# EAGLE board SOCKET_L_PANELISE (EAGLE 9.2.2)
CIRCULAR-LAYOUT-SETTINGS: 0.000000 0.000000 0.238189 -1.000000 0 0
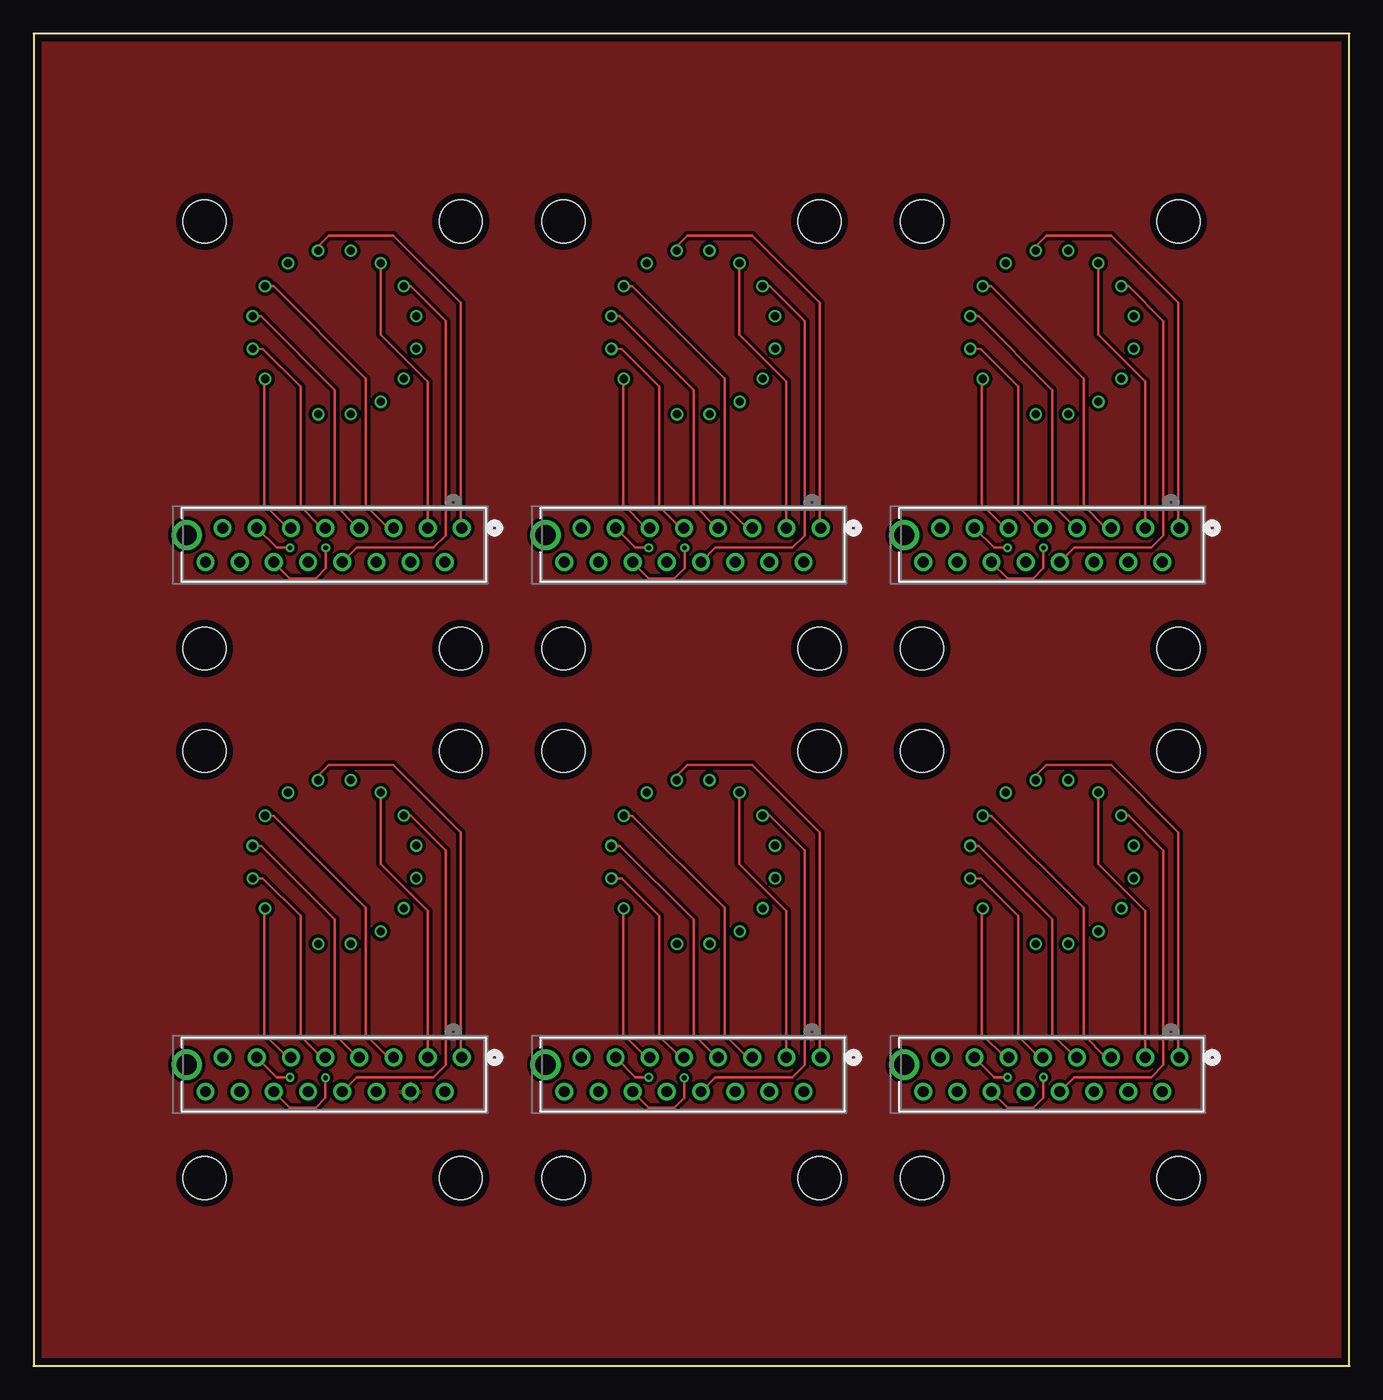
[diagram p0: board, top side]
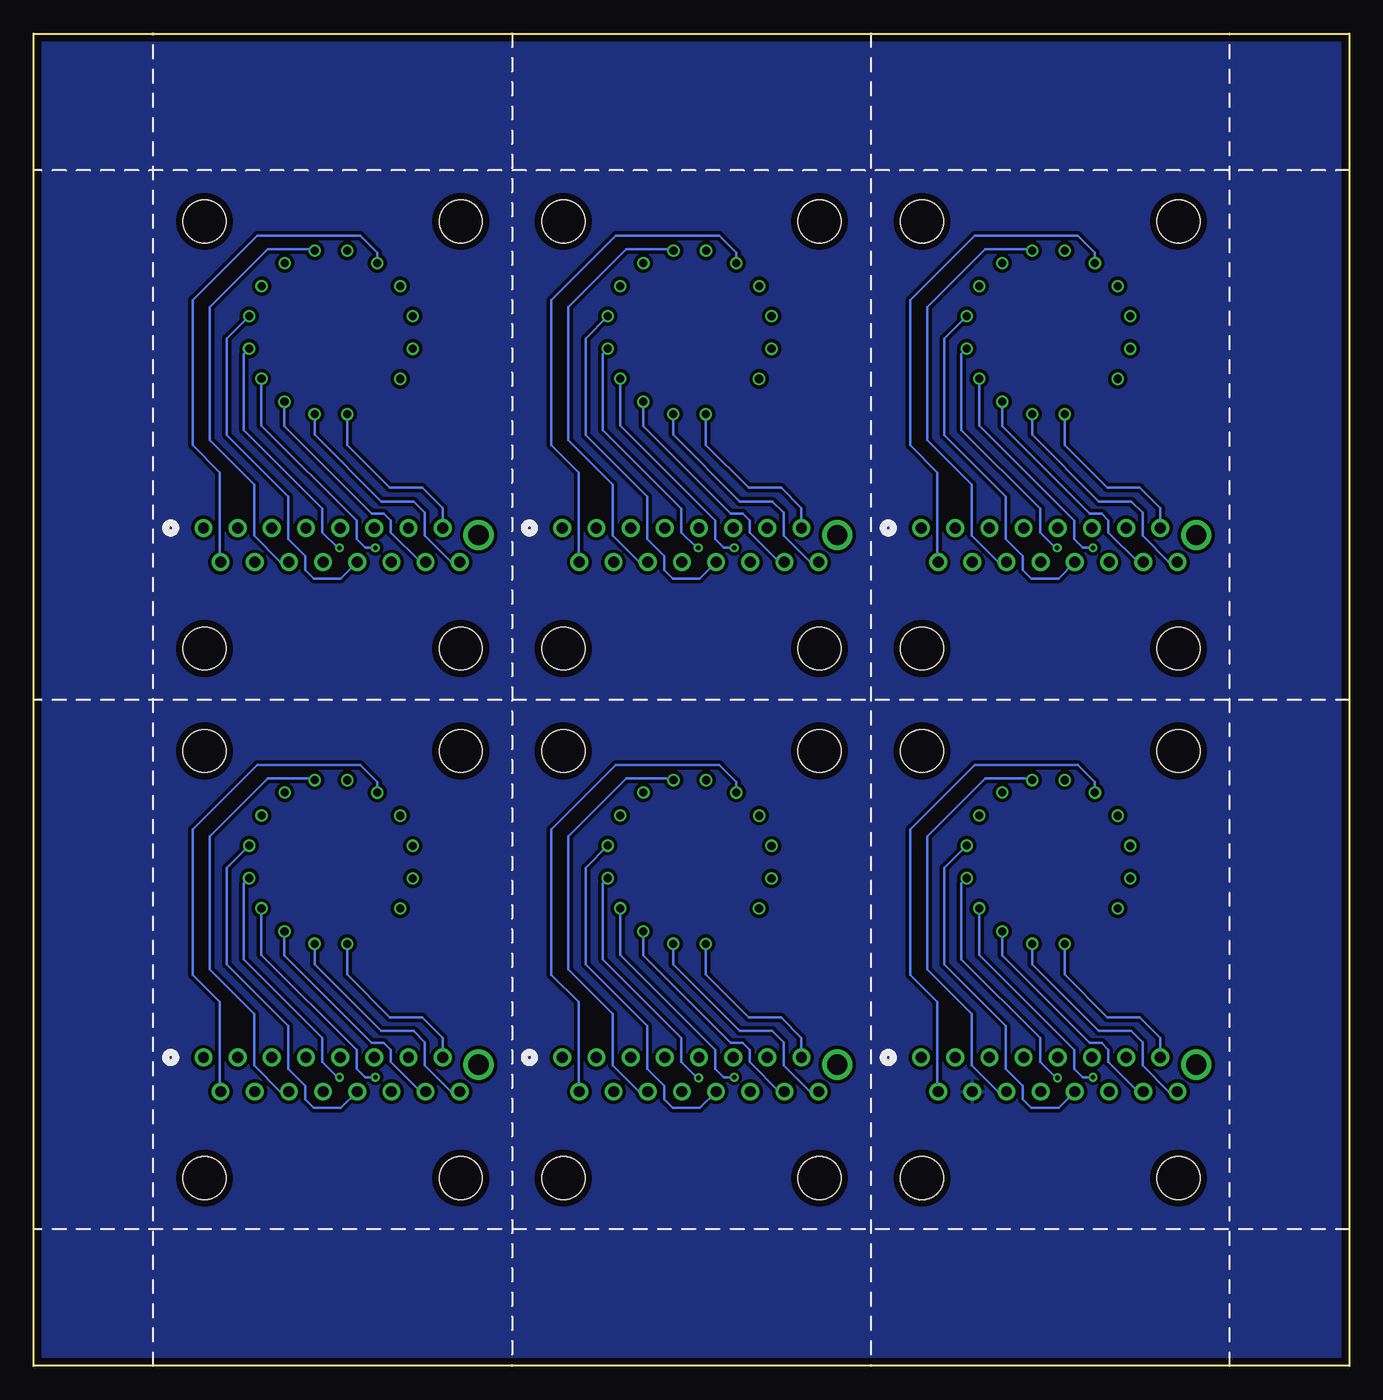
[diagram p1: board, bottom side, seen from below]

Size 97.79 x 99.06 mm. Coordinates in mm from the lower left corner, seen from the top.
Outline: 0,0 97.79,0 97.79,99.06 0,99.06 0,0
Copper layers (1*16): Top 0.035mm / dielectric 1.6mm / Bottom 0.035mm
Design rules "Elecrow_2-layer_PCB_eagle_rule": minimum track width 6mil, minimum drill 12mil, track to track 6mil, track to pad 6mil, pad to pad 6mil, via to via 8mil, smd to smd 0mil, copper to edge 20mil, drill to drill 10mil, minimum pad ring 6mil, minimum via ring 6mil, stop-mask expansion 0mil, vias tented up to drill 100mil, thermal gap 10mil
Net classes: 0 default: width 0.203 mm, clearance 0.254 mm
Holes 3.2 mm at 12.7,45.72 31.75,45.72 12.7,13.97 31.75,13.97 39.37,45.72 58.42,45.72 39.37,13.97 58.42,13.97 66.04,45.72 85.09,45.72 66.04,13.97 85.09,13.97 12.7,85.09 31.75,85.09 12.7,53.34 31.75,53.34 39.37,85.09 58.42,85.09 39.37,53.34 58.42,53.34 66.04,85.09 85.09,85.09 66.04,53.34 85.09,53.34

## Footprints (pad centres in the part's own frame; a part is rotated, then mirrored left to right if it is on the bottom)
CONN16_8-215079-6 = drill 0.813 pad 1.321: 1 0.051,-0.076; 2 2.591,-0.076; 3 5.131,-0.076; 4 7.671,-0.076; 5 10.211,-0.076; 6 12.751,-0.076; 7 15.291,-0.076; 8 17.831,-0.076; 9 1.321,2.464; 10 3.861,2.464; 11 6.401,2.464; 12 8.941,2.464; 13 11.481,2.464; 14 14.021,2.464; 15 16.561,2.464; 16 19.101,2.464 | drill 1.499 pad 1.499: 17 20.498,0.457
IV-27_L = drill 0.6: 1 -5.149,-3.446; 2 -6.076,-1.211; 3 -6.078,1.208; 4 -5.155,3.443; 5 -3.446,5.155; 6 -1.211,6.083; 7 1.208,6.085; 8 3.443,5.161; 9 5.156,3.452; 10 6.083,1.218; 11 6.085,-1.201; 12 5.162,-3.437; 13 3.452,-5.149; 14 1.218,-6.076; 15 -1.201,-6.078

## Placement (x,y rotation side)
IV-27_L  8-215079-6  [CONN16_8-215079-6]  31.88,22.86 180 top
IV-27_L1  8-215079-6  [CONN16_8-215079-6]  58.55,22.86 180 top
IV-27_L2  8-215079-6  [CONN16_8-215079-6]  85.22,22.86 180 top
IV-27_L3  8-215079-6  [CONN16_8-215079-6]  31.88,62.22 180 top
IV-27_L4  8-215079-6  [CONN16_8-215079-6]  58.55,62.22 180 top
IV-27_L5  8-215079-6  [CONN16_8-215079-6]  85.22,62.22 180 top
U$1  IV-27_L  [IV-27_L]  22.35,37.47 0 top
U$2  IV-27_L  [IV-27_L]  49.02,37.47 0 top
U$3  IV-27_L  [IV-27_L]  75.69,37.47 0 top
U$4  IV-27_L  [IV-27_L]  22.35,76.83 0 top
U$5  IV-27_L  [IV-27_L]  49.02,76.83 0 top
U$6  IV-27_L  [IV-27_L]  75.69,76.83 0 top

## Library data of the parts
IV-27_L IV-27_L1-IV-27_L5 = 8-215079-6; MANUFACTURER_PART_NUMBER: 82150796; VENDOR: TE Connectivity
U$1-U$6 = IV-27_L

## Nets
GND: IV-27_L.10
GND1: IV-27_L1.10
GND2: IV-27_L2.10
GND3: IV-27_L3.10
GND4: IV-27_L4.10
GND5: IV-27_L5.10
GRID1: IV-27_L.16 U$1.14
GRID2: IV-27_L.8 U$1.15
GRID3: IV-27_L.9 U$1.5
GRID4: IV-27_L.3 U$1.4
GRID5: IV-27_L.4 U$1.3
GRID6: IV-27_L.5 U$1.2
GRID7: IV-27_L.6 U$1.1
GRID8: IV-27_L1.16 U$2.14
GRID9: IV-27_L1.8 U$2.15
GRID10: IV-27_L1.9 U$2.5
GRID11: IV-27_L1.3 U$2.4
GRID12: IV-27_L1.4 U$2.3
GRID13: IV-27_L1.5 U$2.2
GRID14: IV-27_L1.6 U$2.1
GRID15: IV-27_L2.16 U$3.14
GRID16: IV-27_L2.8 U$3.15
GRID17: IV-27_L2.9 U$3.5
GRID18: IV-27_L2.3 U$3.4
GRID19: IV-27_L2.4 U$3.3
GRID20: IV-27_L2.5 U$3.2
GRID21: IV-27_L2.6 U$3.1
GRID22: IV-27_L3.16 U$4.14
GRID23: IV-27_L3.8 U$4.15
GRID24: IV-27_L3.9 U$4.5
GRID25: IV-27_L3.3 U$4.4
GRID26: IV-27_L3.4 U$4.3
GRID27: IV-27_L3.5 U$4.2
GRID28: IV-27_L3.6 U$4.1
GRID29: IV-27_L4.16 U$5.14
GRID30: IV-27_L4.8 U$5.15
GRID31: IV-27_L4.9 U$5.5
GRID32: IV-27_L4.3 U$5.4
GRID33: IV-27_L4.4 U$5.3
GRID34: IV-27_L4.5 U$5.2
GRID35: IV-27_L4.6 U$5.1
GRID36: IV-27_L5.16 U$6.14
GRID37: IV-27_L5.8 U$6.15
GRID38: IV-27_L5.9 U$6.5
GRID39: IV-27_L5.3 U$6.4
GRID40: IV-27_L5.4 U$6.3
GRID41: IV-27_L5.5 U$6.2
GRID42: IV-27_L5.6 U$6.1
SEG-A: IV-27_L.1 U$1.6
SEG-A1: IV-27_L1.1 U$2.6
SEG-A2: IV-27_L2.1 U$3.6
SEG-A3: IV-27_L3.1 U$4.6
SEG-A4: IV-27_L4.1 U$5.6
SEG-A5: IV-27_L5.1 U$6.6
SEG-B: IV-27_L.2 U$1.8
SEG-B1: IV-27_L1.2 U$2.8
SEG-B2: IV-27_L2.2 U$3.8
SEG-B3: IV-27_L3.2 U$4.8
SEG-B4: IV-27_L4.2 U$5.8
SEG-B5: IV-27_L5.2 U$6.8
SEG-C: IV-27_L.14 U$1.11
SEG-C1: IV-27_L1.14 U$2.11
SEG-C2: IV-27_L2.14 U$3.11
SEG-C3: IV-27_L3.14 U$4.11
SEG-C4: IV-27_L4.14 U$5.11
SEG-C5: IV-27_L5.14 U$6.11
SEG-D: IV-27_L.7 U$1.12
SEG-D1: IV-27_L1.7 U$2.12
SEG-D2: IV-27_L2.7 U$3.12
SEG-D3: IV-27_L3.7 U$4.12
SEG-D4: IV-27_L4.7 U$5.12
SEG-D5: IV-27_L5.7 U$6.12
SEG-DP: IV-27_L.15 U$1.13
SEG-DP1: IV-27_L1.15 U$2.13
SEG-DP2: IV-27_L2.15 U$3.13
SEG-DP3: IV-27_L3.15 U$4.13
SEG-DP4: IV-27_L4.15 U$5.13
SEG-DP5: IV-27_L5.15 U$6.13
SEG-E: IV-27_L.13 U$1.10
SEG-E1: IV-27_L1.13 U$2.10
SEG-E2: IV-27_L2.13 U$3.10
SEG-E3: IV-27_L3.13 U$4.10
SEG-E4: IV-27_L4.13 U$5.10
SEG-E5: IV-27_L5.13 U$6.10
SEG-F: IV-27_L.11 U$1.7
SEG-F1: IV-27_L1.11 U$2.7
SEG-F2: IV-27_L2.11 U$3.7
SEG-F3: IV-27_L3.11 U$4.7
SEG-F4: IV-27_L4.11 U$5.7
SEG-F5: IV-27_L5.11 U$6.7
SEG-G: IV-27_L.12 U$1.9
SEG-G1: IV-27_L1.12 U$2.9
SEG-G2: IV-27_L2.12 U$3.9
SEG-G3: IV-27_L3.12 U$4.9
SEG-G4: IV-27_L4.12 U$5.9
SEG-G5: IV-27_L5.12 U$6.9

## Tracks (layer width: path | path; a pad name or v marks a point on that pad's centre or on a via)
GND
  pour Top (isolate 0.254): 0,99.06 97.79,99.06 97.79,0 0,0
  pour Bottom (isolate 0.254): 0,99.06 97.79,99.06 97.79,0 0,0
GRID1
  Bottom 0.203: U$1.14 23.57,29.86 18.62,24.91 16.2,24.91 15.37,24.07 15.37,22.35 13.41,20.39 IV-27_L.16
GRID2
  Bottom 0.203: U$1.15 21.15,29.1 17.98,25.92 15.56,25.92 14.05,24.4 IV-27_L.8
GRID3
  Bottom 0.203: U$1.5 18.91,43.42 20.17,44.68 27.84,44.68 32.64,39.88 32.64,29.08 30.61,27.05 30.61,20.44 IV-27_L.9
GRID4
  Top 0.203: U$1.4 17.83,40.9 24.7,34.03 24.7,24.59 26.37,22.93 IV-27_L.3
GRID5
  Top 0.203: U$1.3 16.91,38.67 22.38,33.2 22.38,24.66 24.11,22.93 IV-27_L.4
GRID6
  Top 0.203: IV-27_L.5 21.41,22.93 19.84,24.51 19.84,33.45 17.04,36.25 U$1.2
GRID7
  Top 0.203: IV-27_L.6 18.87,22.93 17.15,24.66 17.15,33.96 U$1.1
GRID8
  Bottom 0.203: U$2.14 50.24,29.86 45.29,24.91 42.87,24.91 42.04,24.07 42.04,22.35 40.08,20.39 IV-27_L1.16
GRID9
  Bottom 0.203: U$2.15 47.82,29.1 44.65,25.92 42.23,25.92 40.72,24.4 IV-27_L1.8
GRID10
  Bottom 0.203: U$2.5 45.58,43.42 46.84,44.68 54.51,44.68 59.31,39.88 59.31,29.08 57.28,27.05 57.28,20.44 IV-27_L1.9
GRID11
  Top 0.203: U$2.4 44.5,40.9 51.37,34.03 51.37,24.59 53.04,22.93 IV-27_L1.3
GRID12
  Top 0.203: U$2.3 43.58,38.67 49.05,33.2 49.05,24.66 50.78,22.93 IV-27_L1.4
GRID13
  Top 0.203: IV-27_L1.5 48.08,22.93 46.51,24.51 46.51,33.45 43.71,36.25 U$2.2
GRID14
  Top 0.203: IV-27_L1.6 45.54,22.93 43.81,24.66 43.81,33.96 U$2.1
GRID15
  Bottom 0.203: U$3.14 76.91,29.86 71.96,24.91 69.54,24.91 68.71,24.07 68.71,22.35 66.75,20.39 IV-27_L2.16
GRID16
  Bottom 0.203: U$3.15 74.49,29.1 71.32,25.92 68.9,25.92 67.39,24.4 IV-27_L2.8
GRID17
  Bottom 0.203: U$3.5 72.25,43.42 73.51,44.68 81.18,44.68 85.98,39.88 85.98,29.08 83.95,27.05 83.95,20.44 IV-27_L2.9
GRID18
  Top 0.203: U$3.4 71.17,40.9 78.04,34.03 78.04,24.59 79.7,22.93 IV-27_L2.3
GRID19
  Top 0.203: U$3.3 70.25,38.67 75.72,33.2 75.72,24.66 77.45,22.93 IV-27_L2.4
GRID20
  Top 0.203: IV-27_L2.5 74.75,22.93 73.18,24.51 73.18,33.45 70.38,36.25 U$3.2
GRID21
  Top 0.203: IV-27_L2.6 72.21,22.93 70.48,24.66 70.48,33.96 U$3.1
GRID22
  Bottom 0.203: U$4.14 23.57,69.23 18.62,64.28 16.2,64.28 15.37,63.44 15.37,61.72 13.41,59.76 IV-27_L3.16
GRID23
  Bottom 0.203: U$4.15 21.15,68.47 17.98,65.29 15.56,65.29 14.05,63.77 IV-27_L3.8
GRID24
  Bottom 0.203: U$4.5 18.91,82.79 20.17,84.05 27.84,84.05 32.64,79.25 32.64,68.45 30.61,66.42 30.61,59.81 IV-27_L3.9
GRID25
  Top 0.203: U$4.4 17.83,80.27 24.7,73.4 24.7,63.97 26.37,62.3 IV-27_L3.3
GRID26
  Top 0.203: U$4.3 16.91,78.04 22.38,72.57 22.38,64.03 24.11,62.3 IV-27_L3.4
GRID27
  Top 0.203: IV-27_L3.5 21.41,62.3 19.84,63.88 19.84,72.82 17.04,75.62 U$4.2
GRID28
  Top 0.203: IV-27_L3.6 18.87,62.3 17.15,64.03 17.15,73.33 U$4.1
GRID29
  Bottom 0.203: U$5.14 50.24,69.23 45.29,64.28 42.87,64.28 42.04,63.44 42.04,61.72 40.08,59.76 IV-27_L4.16
GRID30
  Bottom 0.203: U$5.15 47.82,68.47 44.65,65.29 42.23,65.29 40.72,63.77 IV-27_L4.8
GRID31
  Bottom 0.203: U$5.5 45.58,82.79 46.84,84.05 54.51,84.05 59.31,79.25 59.31,68.45 57.28,66.42 57.28,59.81 IV-27_L4.9
GRID32
  Top 0.203: U$5.4 44.5,80.27 51.37,73.4 51.37,63.97 53.04,62.3 IV-27_L4.3
GRID33
  Top 0.203: U$5.3 43.58,78.04 49.05,72.57 49.05,64.03 50.78,62.3 IV-27_L4.4
GRID34
  Top 0.203: IV-27_L4.5 48.08,62.3 46.51,63.88 46.51,72.82 43.71,75.62 U$5.2
GRID35
  Top 0.203: IV-27_L4.6 45.54,62.3 43.81,64.03 43.81,73.33 U$5.1
GRID36
  Bottom 0.203: U$6.14 76.91,69.23 71.96,64.28 69.54,64.28 68.71,63.44 68.71,61.72 66.75,59.76 IV-27_L5.16
GRID37
  Bottom 0.203: U$6.15 74.49,68.47 71.32,65.29 68.9,65.29 67.39,63.77 IV-27_L5.8
GRID38
  Bottom 0.203: U$6.5 72.25,82.79 73.51,84.05 81.18,84.05 85.98,79.25 85.98,68.45 83.95,66.42 83.95,59.81 IV-27_L5.9
GRID39
  Top 0.203: U$6.4 71.17,80.27 78.04,73.4 78.04,63.97 79.7,62.3 IV-27_L5.3
GRID40
  Top 0.203: U$6.3 70.25,78.04 75.72,72.57 75.72,64.03 77.45,62.3 IV-27_L5.4
GRID41
  Top 0.203: IV-27_L5.5 74.75,62.3 73.18,63.88 73.18,72.82 70.38,75.62 U$6.2
GRID42
  Top 0.203: IV-27_L5.6 72.21,62.3 70.48,64.03 70.48,73.33 U$6.1
SEG-A
  Top 0.203: U$1.6 21.14,43.9 21.92,44.68 26.75,44.68 31.75,39.67 31.75,22.96 IV-27_L.1
SEG-A1
  Top 0.203: U$2.6 47.81,43.9 48.59,44.68 53.42,44.68 58.42,39.67 58.42,22.96 IV-27_L1.1
SEG-A2
  Top 0.203: U$3.6 74.48,43.9 75.26,44.68 80.09,44.68 85.09,39.67 85.09,22.96 IV-27_L2.1
SEG-A3
  Top 0.203: U$4.6 21.14,83.27 21.92,84.05 26.75,84.05 31.75,79.05 31.75,62.33 IV-27_L3.1
SEG-A4
  Top 0.203: U$5.6 47.81,83.27 48.59,84.05 53.42,84.05 58.42,79.05 58.42,62.33 IV-27_L4.1
SEG-A5
  Top 0.203: U$6.6 74.48,83.27 75.26,84.05 80.09,84.05 85.09,79.05 85.09,62.33 IV-27_L5.1
SEG-B
  Top 0.203: IV-27_L.2 29.29,33.83 25.8,37.32 U$1.8
SEG-B1
  Top 0.203: IV-27_L1.2 55.96,33.83 52.47,37.32 U$2.8
SEG-B2
  Top 0.203: IV-27_L2.2 82.63,33.83 79.14,37.32 U$3.8
SEG-B3
  Top 0.203: IV-27_L3.2 29.29,73.2 25.8,76.69 U$4.8
SEG-B4
  Top 0.203: IV-27_L4.2 55.96,73.2 52.47,76.69 U$5.8
SEG-B5
  Top 0.203: IV-27_L5.2 82.63,73.2 79.14,76.69 U$6.8
SEG-C  (via drill 0.35)
  Top 0.203: v21.69,21.41 21.69,19.91 20.95,19.18 19.05,19.18 17.86,20.37 IV-27_L.14
  Bottom 0.203: U$1.11 28.83,35.87 28.83,30.23 22.99,24.38 22.99,22.61 21.79,21.41 v21.69,21.41
SEG-C1  (via drill 0.35)
  Top 0.203: v48.36,21.41 48.36,19.91 47.62,19.18 45.72,19.18 44.53,20.37 IV-27_L1.14
  Bottom 0.203: U$2.11 55.5,35.87 55.5,30.23 49.66,24.38 49.66,22.61 48.46,21.41 v48.36,21.41
SEG-C2  (via drill 0.35)
  Top 0.203: v75.06,21.46 75.06,19.94 74.3,19.18 72.39,19.18 71.2,20.37 IV-27_L2.14
  Bottom 0.203: U$3.11 82.17,35.87 82.17,30.23 76.33,24.38 76.33,22.61 75.18,21.46 v75.06,21.46
SEG-C3  (via drill 0.35)
  Top 0.203: v21.72,60.83 21.72,59.31 20.95,58.55 19.05,58.55 17.86,59.74 IV-27_L3.14
  Bottom 0.203: U$4.11 28.83,75.24 28.83,69.6 22.99,63.75 22.99,61.98 21.84,60.83 v21.72,60.83
SEG-C4  (via drill 0.35)
  Top 0.203: v48.39,60.83 48.39,59.31 47.62,58.55 45.72,58.55 44.53,59.74 IV-27_L4.14
  Bottom 0.203: U$5.11 55.5,75.24 55.5,69.6 49.66,63.75 49.66,61.98 48.51,60.83 v48.39,60.83
SEG-C5  (via drill 0.35)
  Top 0.203: v75.06,60.83 75.06,59.31 74.3,58.55 72.39,58.55 71.2,59.74 IV-27_L5.14
  Bottom 0.203: U$6.11 82.17,75.24 82.17,69.6 76.33,63.75 76.33,61.98 75.18,60.83 v75.06,60.83
SEG-D  (via drill 0.35)
  Top 0.203: v19.05,21.46 18.05,21.46 IV-27_L.7
  Bottom 0.203: U$1.12 27.51,30.56 20.45,23.5 20.45,22.1 19.81,21.46 v19.05,21.46
SEG-D1  (via drill 0.35)
  Top 0.203: v45.72,21.46 44.72,21.46 IV-27_L1.7
  Bottom 0.203: U$2.12 54.18,30.56 47.12,23.5 47.12,22.1 46.48,21.46 v45.72,21.46
SEG-D2  (via drill 0.35)
  Top 0.203: v72.39,21.46 71.39,21.46 IV-27_L2.7
  Bottom 0.203: U$3.12 80.85,30.56 73.79,23.5 73.79,22.1 73.15,21.46 v72.39,21.46
SEG-D3  (via drill 0.35)
  Top 0.203: v19.05,60.83 18.05,60.83 IV-27_L3.7
  Bottom 0.203: U$4.12 27.51,69.93 20.45,62.86 20.45,61.47 19.81,60.83 v19.05,60.83
SEG-D4  (via drill 0.35)
  Top 0.203: v45.72,60.83 44.72,60.83 IV-27_L4.7
  Bottom 0.203: U$5.12 54.18,69.93 47.12,62.86 47.12,61.47 46.48,60.83 v45.72,60.83
SEG-D5  (via drill 0.35)
  Top 0.203: v72.39,60.83 71.39,60.83 IV-27_L5.7
  Bottom 0.203: U$6.12 80.85,69.93 73.79,62.86 73.79,61.47 73.15,60.83 v72.39,60.83
SEG-DP
  Bottom 0.203: U$1.13 25.8,30.5 19.3,24 18.41,24 17.91,23.5 17.91,22.61 15.69,20.39 IV-27_L.15
SEG-DP1
  Bottom 0.203: U$2.13 52.47,30.5 45.97,24 45.09,24 44.58,23.5 44.58,22.61 42.36,20.39 IV-27_L1.15
SEG-DP2
  Bottom 0.203: U$3.13 79.14,30.5 72.64,24 71.75,24 71.25,23.5 71.25,22.61 69.03,20.39 IV-27_L2.15
SEG-DP3
  Bottom 0.203: U$4.13 25.8,69.87 19.3,63.37 18.41,63.37 17.91,62.86 17.91,61.98 15.69,59.76 IV-27_L3.15
SEG-DP4
  Bottom 0.203: U$5.13 52.47,69.87 45.97,63.37 45.09,63.37 44.58,62.86 44.58,61.98 42.36,59.76 IV-27_L4.15
SEG-DP5
  Bottom 0.203: U$6.13 79.14,69.87 72.64,63.37 71.75,63.37 71.25,62.86 71.25,61.98 69.03,59.76 IV-27_L5.15
SEG-E
  Bottom 0.203: U$1.10 30.1,37.02 30.1,29.84 25.53,25.27 25.53,22.1 24.26,20.83 24.26,19.81 23.62,19.18 21.61,19.18 IV-27_L.13
SEG-E1
  Bottom 0.203: U$2.10 56.77,37.02 56.77,29.84 52.2,25.27 52.2,22.1 50.93,20.83 50.93,19.81 50.29,19.18 48.28,19.18 IV-27_L1.13
SEG-E2
  Bottom 0.203: U$3.10 83.44,37.02 83.44,29.84 78.87,25.27 78.87,22.1 77.6,20.83 77.6,19.81 76.96,19.18 74.95,19.18 IV-27_L2.13
SEG-E3
  Bottom 0.203: U$4.10 30.1,76.38 30.1,69.22 25.53,64.64 25.53,61.47 24.26,60.2 24.26,59.18 23.62,58.55 21.61,58.55 IV-27_L3.13
SEG-E4
  Bottom 0.203: U$5.10 56.77,76.38 56.77,69.22 52.2,64.64 52.2,61.47 50.93,60.2 50.93,59.18 50.29,58.55 48.28,58.55 IV-27_L4.13
SEG-E5
  Bottom 0.203: U$6.10 83.44,76.38 83.44,69.22 78.87,64.64 78.87,61.47 77.6,60.2 77.6,59.18 76.96,58.55 74.95,58.55 IV-27_L5.13
SEG-F
  Bottom 0.203: U$1.7 23.68,43.67 27.07,43.67 31.37,39.37 31.37,29.46 28.07,26.16 28.07,22.35 26.11,20.39 IV-27_L.11
SEG-F1
  Bottom 0.203: U$2.7 50.35,43.67 53.74,43.67 58.04,39.37 58.04,29.46 54.74,26.16 54.74,22.35 52.78,20.39 IV-27_L1.11
SEG-F2
  Bottom 0.203: U$3.7 77.02,43.67 80.41,43.67 84.71,39.37 84.71,29.46 81.41,26.16 81.41,22.35 79.45,20.39 IV-27_L2.11
SEG-F3
  Bottom 0.203: U$4.7 23.68,83.04 27.07,83.04 31.37,78.74 31.37,68.83 28.07,65.53 28.07,61.72 26.11,59.76 IV-27_L3.11
SEG-F4
  Bottom 0.203: U$5.7 50.35,83.04 53.74,83.04 58.04,78.74 58.04,68.83 54.74,65.53 54.74,61.72 52.78,59.76 IV-27_L4.11
SEG-F5
  Bottom 0.203: U$6.7 77.02,83.04 80.41,83.04 84.71,78.74 84.71,68.83 81.41,65.53 81.41,61.72 79.45,59.76 IV-27_L5.11
SEG-G
  Top 0.203: U$1.9 28.05,40.91 30.63,38.33 30.63,22.38 29.72,21.46 24.01,21.46 IV-27_L.12
SEG-G1
  Top 0.203: U$2.9 54.72,40.91 57.3,38.33 57.3,22.38 56.39,21.46 50.68,21.46 IV-27_L1.12
SEG-G2
  Top 0.203: U$3.9 81.39,40.91 83.97,38.33 83.97,22.38 83.06,21.46 77.35,21.46 IV-27_L2.12
SEG-G3
  Top 0.203: U$4.9 28.05,80.28 30.63,77.7 30.63,61.75 29.72,60.83 24.01,60.83 IV-27_L3.12
SEG-G4
  Top 0.203: U$5.9 54.72,80.28 57.3,77.7 57.3,61.75 56.39,60.83 50.68,60.83 IV-27_L4.12
SEG-G5
  Top 0.203: U$6.9 81.39,80.28 83.97,77.7 83.97,61.75 83.06,60.83 77.35,60.83 IV-27_L5.12